# Altium PCB HBridgeMainBoard.PcbDoc (part 1 of 3)
Units mm, origin at the board's own origin, x right, y up, seen from the top; angles counter-clockwise.
Board outline 100 x 50 mm, 2 copper layers (Top Layer, Bottom Layer); 90 components, 87 nets, 308 pads, 1694 vias.
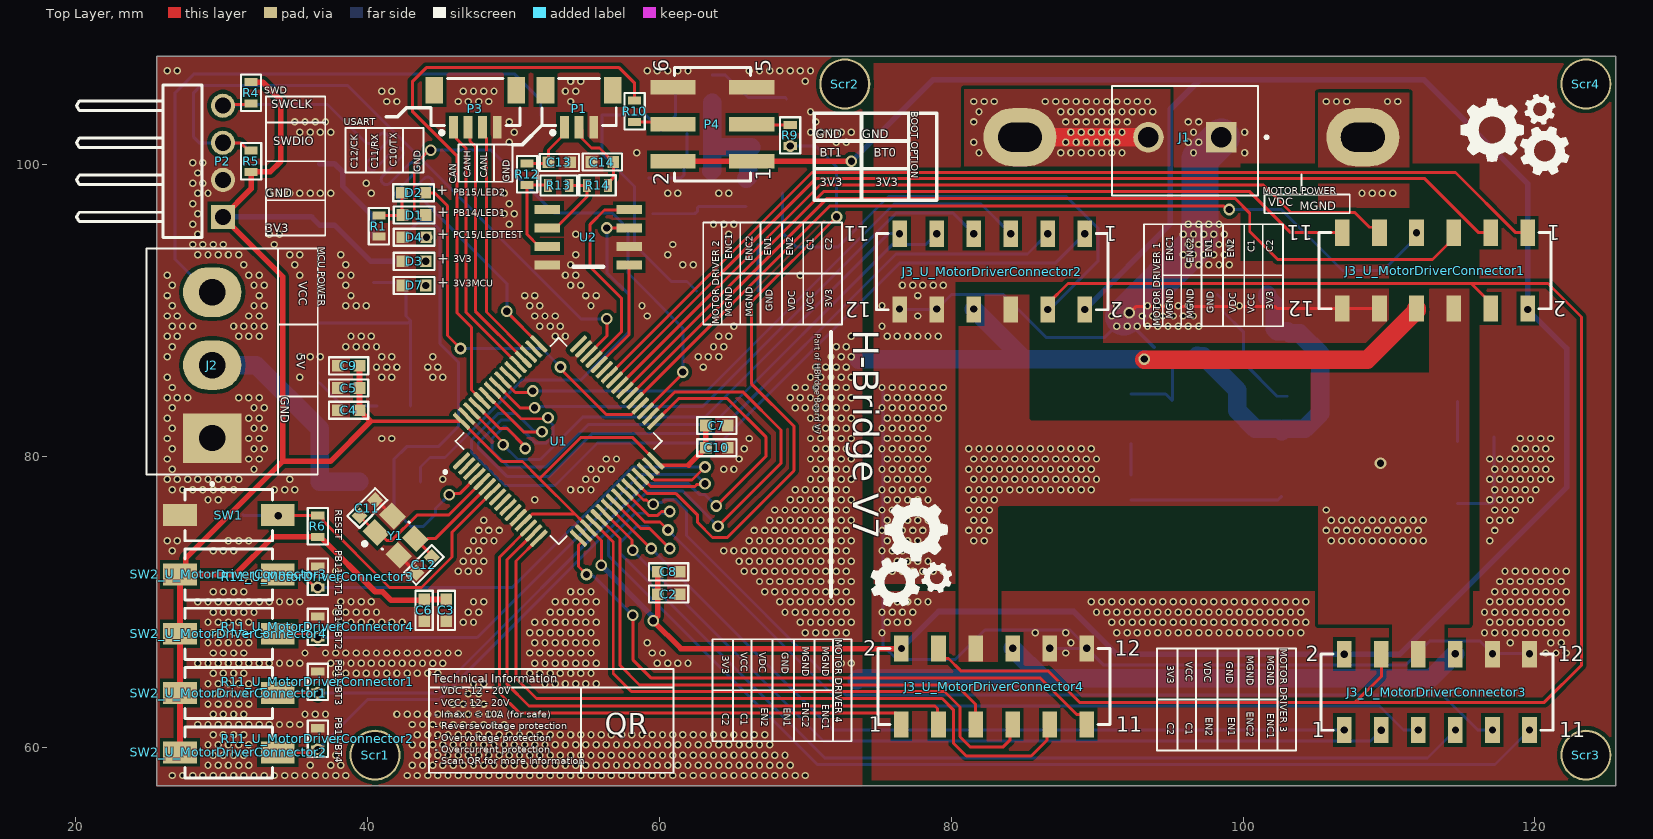
[diagram p0: Top Layer view]
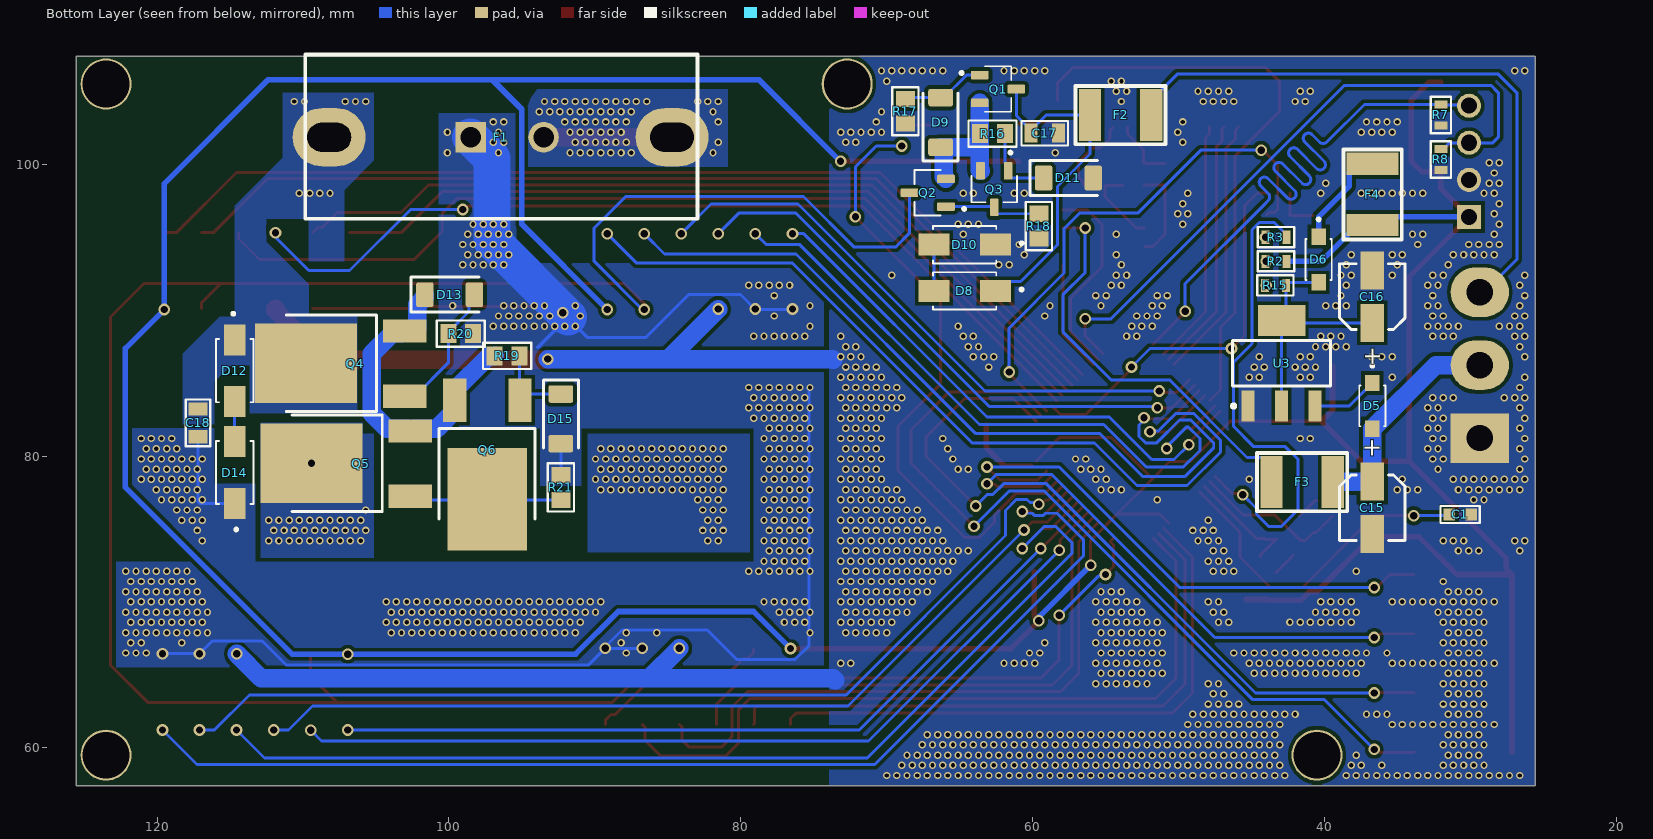
[diagram p1: Bottom Layer view, seen from below]
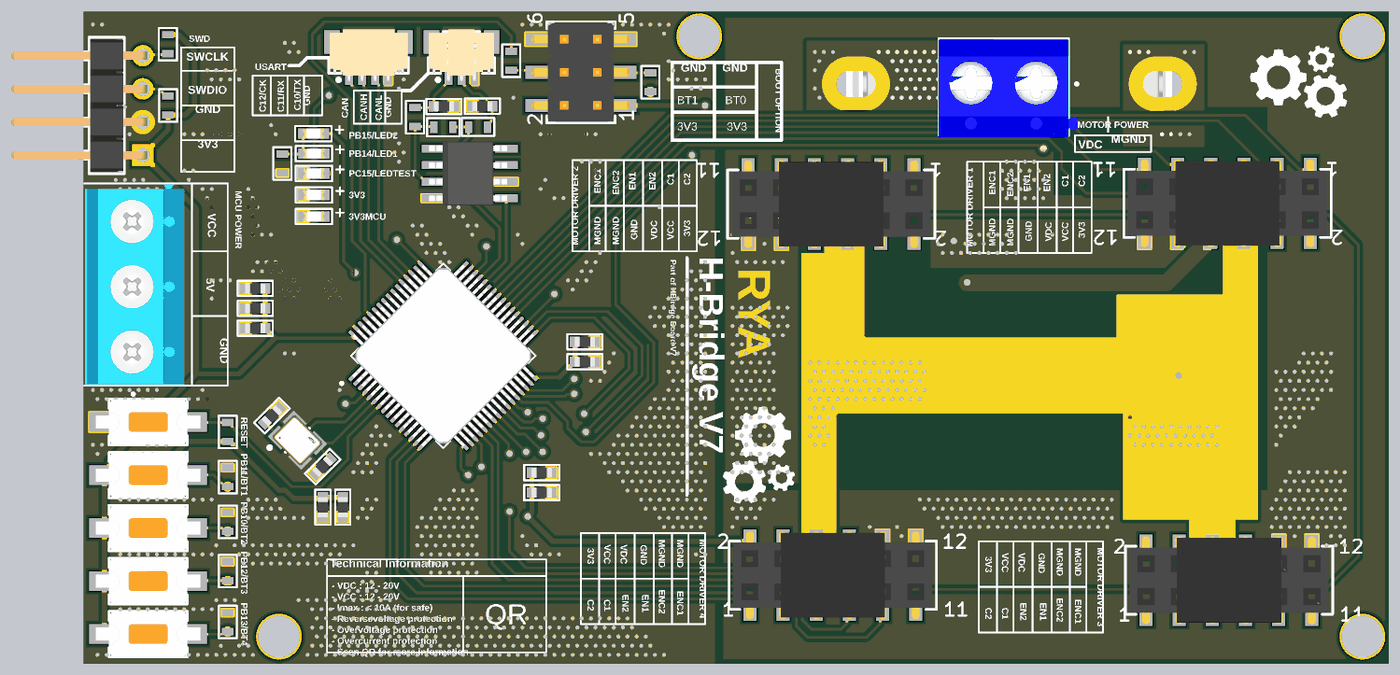
[diagram p3: 3D render of the assembled board from above, using the file's embedded part models]
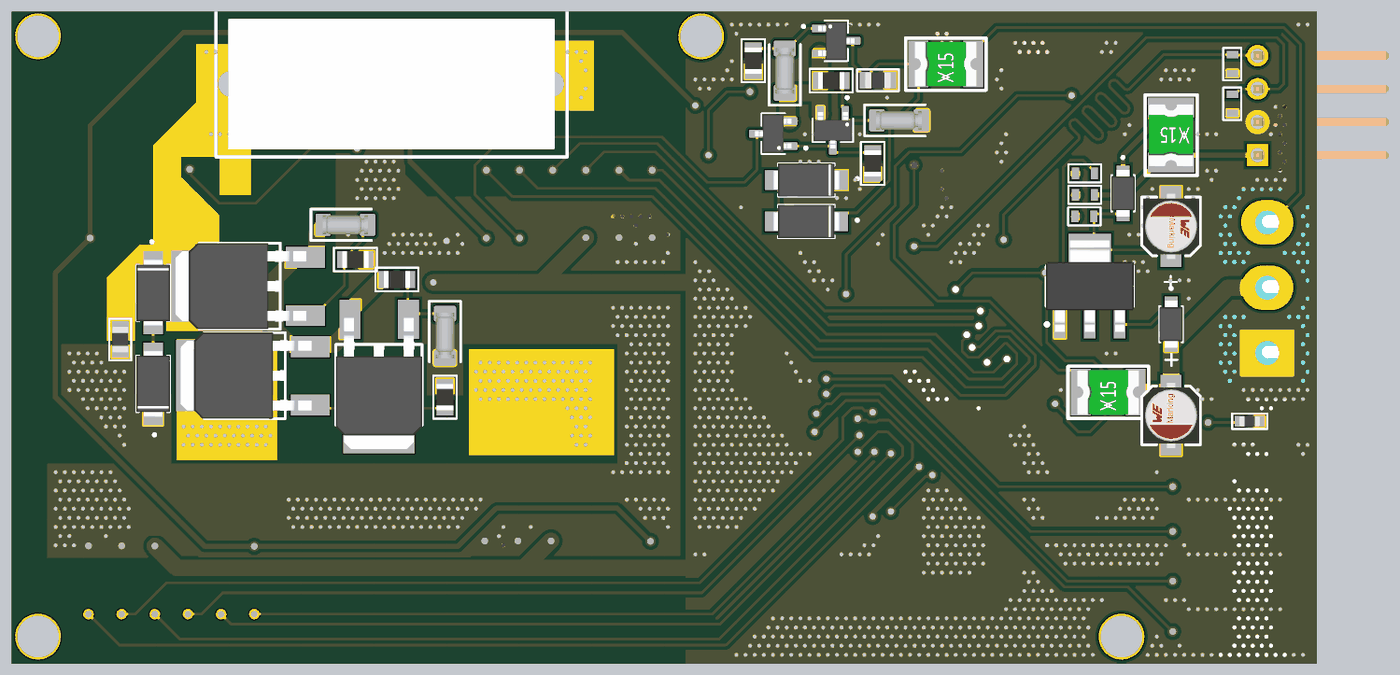
[diagram p4: 3D render of the assembled board from below, using the file's embedded part models]

## Layer stack, top to bottom
Top Solder: solder mask 0.0102, Solder Resist, Dk 3.5
Top Layer: signal copper 0.0356
Dielectric 1: dielectric 0.32, FR-4, Dk 4.8
Bottom Layer: signal copper 0.0356
Bottom Solder: solder mask 0.0102, Solder Resist, Dk 3.5

## Board outline
25.527,57.404 25.527,107.404 125.527,107.404 125.527,57.404

## Design rules (kind name [scope] priority, off if disabled: settings)
Clearance [All] p1: gap=0.254 ignorepadtopadclearanceinfootprint=FALSE except(0.05: SMDPad-SMDPad; 0.127: Arc-Arc Arc-Track Arc-SMDPad Track-Track Track-SMDPad)
MatchedLengths "Schematic Matched Net Lengths_3" [InNet('NetP2_3')] p1: tolerance=25.4 checknetsindiffpair=FALSE checkdiffpairvsdiffpair=TRUE checkxsignals=TRUE checkothers=TRUE usedelayunits=TRUE delaytolerance=10.000000
MatchedLengths "Schematic Matched Net Lengths_2" [InNet('NetP2_4')] p2: tolerance=25.4 checknetsindiffpair=FALSE checkdiffpairvsdiffpair=TRUE checkxsignals=TRUE checkothers=TRUE usedelayunits=TRUE delaytolerance=10.000000
PolygonConnect [All] p1: connectstyle=Direct reliefconductorwidth=0.254 reliefentries=4 polygonreliefangle="90 Angle" airgapwidth=0.254
RoutingVias [All] p1: holewidth=0.711 width=1.27 viastyle="Through Hole" minholewidth=0.711 minwidth=1.27 maxholewidth=0.711 maxwidth=1.27
SilkToSilkClearance [All] p1: silktosilkclearance=0
SilkToSolderMaskClearance [IsPad] p1: minsilkscreentomaskgap=0 clearancetoexposedcopper=TRUE
SolderMaskExpansion [All] p1: expansion=0.102 istentingtop=FALSE
SupplyNets "Schematic Supply Nets_13" [InNet('Vin')] p1: voltage=0.000
SupplyNets "Schematic Supply Nets_10" [InNet('MGND')] p2: voltage=0.000
SupplyNets "Schematic Supply Nets_6" [InNet('GND')] p3: voltage=0.000
SupplyNets "Schematic Supply Nets_4" [InNet('VDCin')] p4: voltage=0.000
SupplyNets "Schematic Supply Nets_16" [InNet('CAN5V')] p5: voltage=0.000
SupplyNets "Schematic Supply Nets_14" [InNet('VDC_U_MotorDriverConnector1')] p6: voltage=0.000
SupplyNets "Schematic Supply Nets_12" [InNet('3V3')] p7: voltage=0.000
SupplyNets "Schematic Supply Nets_11" [InNet('POWER3V3')] p8: voltage=0.000
SupplyNets "Schematic Supply Nets_7" [InNet('VDC')] p9: voltage=0.000
SupplyNets "Schematic Supply Nets_5" [InNet('5V')] p10: voltage=0.000
SupplyNets "Schematic Supply Nets_3" [InNet('VCC_U_MotorDriverConnector1')] p11: voltage=0.000
SupplyNets "Schematic Supply Nets" [InNet('VCC')] p12: voltage=0.000
Width "Schematic Width Constraint_9" [InNet('VDCin')] p1: maxlimit=2.54 minlimit=1.27 preferedwidth=1.27
Width "Schematic Width Constraint_8" [InNet('NetD13_K')] p2: maxlimit=2.54 minlimit=1.27 preferedwidth=1.27
Width "Schematic Width Constraint_7" [InNet('NetD9_K')] p3: maxlimit=2.54 minlimit=1.27 preferedwidth=1.27
Width "Schematic Width Constraint_4" [InNet('VDC_U_MotorDriverConnector1')] p4: maxlimit=2.54 minlimit=1.27 preferedwidth=1.27
Width "Schematic Width Constraint_3" [InNet('3V3')] p5: maxlimit=2.54 minlimit=0.178 preferedwidth=0.381
Width "Schematic Width Constraint_2" [InNet('POWER3V3')] p6: maxlimit=2.54 minlimit=0.178 preferedwidth=0.381
Width "Schematic Width Constraint_1" [InNet('VDC')] p7: maxlimit=2.54 minlimit=1.27 preferedwidth=1.27
Width [All] p8: maxlimit=2.54 minlimit=0.127 preferedwidth=0.203
28 further rules are at their usual default settings.

## Classes and differential pairs
component class U_VDCProtect: C18 D12 D13 D14 D15 Q4 Q5 Q6 R14 R15 R21
channel class MotorDriverConnector: U_MotorDriverConnector1 U_MotorDriverConnector2 U_MotorDriverConnector3 U_MotorDriverConnector4
component class U_TopLevelDesign: D1 D2 F1 F2 F3 F4 J1 J2 P1 P2 P3 R1 Scr1 Scr2 Scr3 Scr4
component class U_Protect: C17 D8 D9 D10 D11 Q1 Q2 Q3 R16 R17 R18
component class U_POWER: C15 C16 D5 D6 D7 R15 U3
component class U_MotorDriverConnector4: J3_U_MotorDriverConnector4 R11_U_MotorDriverConnector4 SW2_U_MotorDriverConnector4
component class U_MotorDriverConnector3: J3_U_MotorDriverConnector3 R11_U_MotorDriverConnector3 SW2_U_MotorDriverConnector3
component class U_MotorDriverConnector2: J3_U_MotorDriverConnector2 R11_U_MotorDriverConnector2 SW2_U_MotorDriverConnector2
component class U_MotorDriverConnector1: J3_U_MotorDriverConnector1 R11_U_MotorDriverConnector1 SW2_U_MotorDriverConnector1
component class U_MCU: C1 C2 C3 C4 C5 C6 C7 C8 C9 C10 C11 C12 D3 D4 P4 R2 R3 R4 R5 R6 R7 R8 R9 R10 SW1 U1 Y1
component class U_CAN_IC: C13 C14 R12 R13 R14 U2

## Components (designator, comment, footprint, x,y, rotation, side; value= is the part's Value field where it differs from the comment)
C1 "0106031041050" CAP_0603 30.734,76.073 r0 bottom value=100nF
C2 "0106031061010" CAP_0603 60.579,70.612 r180 top value=10µF
C3 "0106031051016" CAP_0603 45.466,69.469 r90 top value=1µF
C4 "0106031041050" CAP_0603 38.735,83.058 r0 top value=100nF
C5 "0106031041050" CAP_0603 38.735,84.582 r0 top value=100nF
C6 "0106031041050" CAP_0603 43.942,69.469 r90 top value=100nF
C7 "0106031041050" CAP_0603 63.881,82.169 r180 top value=100nF
C8 "0106031041050" CAP_0603 60.579,72.136 r180 top value=100nF
C9 "0106031051016" CAP_0603 38.735,86.106 r0 top value=1µF
C10 "0106031041050" CAP_0603 63.881,80.645 r180 top value=100nF
C11 "0106030800550" CAP_0603 39.878,76.454 r225 top value=8pF
C12 "0106030800550" CAP_0603 43.942,72.517 r45 top value=8pF
C13 "0106033300550" CAP_0603 53.086,100.203 r180 top value=33pF
C14 "0106033300550" CAP_0603 56.134,100.076 r0 top value=33pF
C15 "865080340003" WCAP-ASLI_D4H5.5 36.703,76.454 r90 bottom value="22uF, 16V"
C16 "865080340003" WCAP-ASLI_D4H5.5 36.703,90.932 r270 bottom value="22uF, 16V"
C17 "0108051041050" CAP_0805 59.182,102.108 r0 bottom value=100nF
C18 "0108051041050" CAP_0805 117.221,82.296 r90 bottom value=100nF
D1 "160603BlueClear" WL-SMCW_0603_H=0.7mm 43.18,96.52 r0 top value="Blue, 3.2V"
D2 "160603BlueClear" WL-SMCW_0603_H=0.7mm 43.142,98.044 r0 top value="Blue, 3.2V"
D3 "160603RedBlur" WL-SMCW_0603_H=0.7mm 43.18,93.345 r0 top value="Red, 2V"
D4 "160603WhiteBlur" WL-SMCW_0603_H=0.7mm 43.18,94.996 r0 top value=White
D5 "1N5819W" 1N5819W 36.703,83.439 r270 bottom
D6 "1N5819W" 1N5819W 40.386,93.472 r270 bottom
D7 "160603RedBlur" WL-SMCW_0603_H=0.7mm 43.18,91.694 r0 top value="Red, 2V"
D8 "SMAJ18A" DIOM4325X250N 64.643,91.313 r0 bottom
D9 "ZMM18" SOD-80_MiniMELF_Glass 66.294,102.87 r90 bottom value=Shottky-Diode
D10 "SMAJ18A" DIOM4325X250N 64.643,94.488 r0 bottom
D11 "ZMM18" SOD-80_MiniMELF_Glass 57.531,99.06 r180 bottom value=Shottky-Diode
D12 "SMAJ18A" DIOM4325X250N 114.681,85.852 r270 bottom
D13 "ZMM18" SOD-80_MiniMELF_Glass 99.949,91.059 r180 bottom value=Shottky-Diode
D14 "SMAJ18A" DIOM4325X250N 114.681,78.867 r90 bottom
D15 "ZMM18" SOD-80_MiniMELF_Glass 92.329,82.55 r270 bottom value=Shottky-Diode
F1 "0605201000250F" Fuse_Clip_0520 96.454,101.854 r0 bottom value="250 VAC, 10A"
F2 "061812110024" Fuse_SMD_1812 53.975,103.378 r0 bottom value="24V, 1.1A"
F3 "061812110024" Fuse_SMD_1812 41.529,78.232 r0 bottom value="24V, 1.1A"
F4 "061812020030" Fuse_SMD_1812 36.703,97.917 r270 bottom value="30V, 0.2A"
J1 "KF301-2P" HANDSON_KF301-2P 96.012,101.854 r180 top
J2 "796683-3" TE_796683-3 29.337,81.233 r90 top
J3_U_MotorDriverConnector1 "61031221821" 61031221821 113.157,92.71 r180 top (schematic designator J3)
J3_U_MotorDriverConnector2 "61031221821" 61031221821 82.804,92.643 r180 top (schematic designator J3)
J3_U_MotorDriverConnector3 "61031221821" 61031221821 113.284,63.821 r0 top (schematic designator J3)
J3_U_MotorDriverConnector4 "61031221821" 61031221821 82.931,64.202 r0 top (schematic designator J3)
P1 "665303124022" 665303124022 54.483,104.267 r0 top value="1A, 125 V (AC)"
P2 "61300411021" 61300411021 27.305,100.203 r270 top
P3 "665304124022" 665304124022 47.371,104.267 r0 top value="1A, 125 V (AC)"
P4 "61030621121" 61030621121 63.627,102.743 r90 top
Q1 "AO3407A" SOT95P280X125-3N 62.357,105.156 r180 bottom
Q2 "AO3407A" SOT95P280X125-3N 67.183,98.044 r0 bottom
Q3 "AO3407A" SOT95P280X125-3N 62.611,98.298 r270 bottom
Q4 "AOD4185" DPAK 107.95,86.36 r90 bottom
Q5 "AOD4185" DPAK 107.569,79.502 r90 bottom
Q6 "AOD4185" DPAK 97.384,78.892 r0 bottom
R1 "0006031021" resistor_0603 40.767,95.758 r90 top value="1 KOhm, 1/4 W"
R2 "0006031021" resistor_0603 43.307,93.345 r180 bottom value="1 KOhm, 1/4 W"
R3 "0006031021" resistor_0603 43.307,94.996 r180 bottom value="1 KOhm, 1/4 W"
R4 "0006030001" resistor_0603 32.004,104.902 r90 top value="0 Ohm, 1/4 W"
R5 "0006031031" resistor_0603 32.004,100.203 r270 top value="10 KOhm, 1/4 W"
R6 "0006031031" resistor_0603 36.576,75.184 r270 top value="10 KOhm, 1/4 W"
R7 "0006031031" resistor_0603 32.004,103.378 r90 bottom value="10 KOhm, 1/4 W"
R8 "0006030001" resistor_0603 32.004,100.33 r90 bottom value="0 Ohm, 1/4 W"
R9 "0006031031" resistor_0603 68.961,101.981 r90 top value="10 KOhm, 1/4 W"
R10 "0006031031" resistor_0603 58.293,103.632 r270 top value="10 KOhm, 1/4 W"
R11_U_MotorDriverConnector1 "0006031031" resistor_0603 36.576,64.516 r270 top value="10 KOhm, 1/4 W" (schematic designator R11)
R11_U_MotorDriverConnector2 "0006031031" resistor_0603 36.576,60.616 r270 top value="10 KOhm, 1/4 W" (schematic designator R11)
R11_U_MotorDriverConnector3 "0006031031" resistor_0603 36.576,71.718 r270 top value="10 KOhm, 1/4 W" (schematic designator R11)
R11_U_MotorDriverConnector4 "0006031031" resistor_0603 36.576,68.289 r270 top value="10 KOhm, 1/4 W" (schematic designator R11)
R12 "0006030001" resistor_0603 50.927,99.314 r90 top value="0 Ohm, 1/4 W"
R13 "0006031211" resistor_0603 53.086,98.552 r180 top value="120 Ohm, 1/4 W"
R14 "0006030001" resistor_0603 55.753,98.552 r0 top value="0 Ohm, 1/4 W"
R15 "0006031021" resistor_0603 43.344,91.694 r180 bottom value="1 KOhm, 1/4 W"
R16 "0008051031" RESISTOR_0805 62.738,102.108 r0 bottom value="10 KOhm, 1/8 W"
R17 "0008051031" RESISTOR_0805 68.707,103.632 r90 bottom value="10 KOhm, 1/8 W"
R18 "0008051031" RESISTOR_0805 59.563,95.758 r90 bottom value="10 KOhm, 1/8 W"
R19 "0008051031" RESISTOR_0805 96.012,86.868 r0 bottom value="10 KOhm, 1/8 W"
R20 "0008051031" RESISTOR_0805 99.187,88.392 r0 bottom value="10 KOhm, 1/8 W"
R21 "0008051031" RESISTOR_0805 92.329,77.851 r270 bottom value="10 KOhm, 1/8 W"
Scr1 "MP3.2" MP3.2 40.5,59.5 r90 top
Scr2 "MP3.2" MP3.2 72.7,105.5 r90 top
Scr3 "MP3.2" MP3.2 123.5,59.5 r90 top
Scr4 "MP3.2" MP3.2 123.5,105.5 r90 top
SW1 "434111043826" WS-TASV_L6W3.5H4.3_4341x10438x6 30.48,75.946 r0 top
SW2_U_MotorDriverConnector1 "434111043826" WS-TASV_L6W3.5H4.3_4341x10438x6 30.48,63.754 r180 top (schematic designator SW2)
SW2_U_MotorDriverConnector2 "434111043826" WS-TASV_L6W3.5H4.3_4341x10438x6 30.48,59.69 r180 top (schematic designator SW2)
SW2_U_MotorDriverConnector3 "434111043826" WS-TASV_L6W3.5H4.3_4341x10438x6 30.48,71.882 r180 top (schematic designator SW2)
SW2_U_MotorDriverConnector4 "434111043826" WS-TASV_L6W3.5H4.3_4341x10438x6 30.48,67.818 r180 top (schematic designator SW2)
U1 "STM32F103RCT6" QFP50P1200X1200X160-64N 53.086,81.026 r45 top
U2 "TJA1050" SOP8 55.118,94.996 r90 top
U3 "AMS1117-3.3V" "AMS1117-3.3V SOT223" 42.926,86.36 r90 bottom value="3.3V, 1A"
Y1 "CMP-200220-000002-1" FP-NX3225SA-MFG 41.91,74.549 r315 top

## Footprints (in the part's own frame and the unit in brackets; to place one, negate y for a bottom-side part, rotate by r counter-clockwise, add the part's x,y. Pads: shape width x height; smd on the part's side, far side on the other; paste and mask are expansions set on the pad)
1N5819W [mm]
  rect 1.12x0.99 smd: A(1.57,0) K(-1.57,0)
  silkscreen extent -2.85,-0.9 1.4,0.9, body extent -1.8,-0.9 1.8,0.9, height 1.1
61030621121 [mm] "Pin Header, pitch 2.54 mm, SMD, Vertical, dual row, 6p"
  rect 1x3.1 smd: 1(-2.54,-2.7) 2(-2.54,2.7) 3(0,-2.7) 4(0,2.7) 5(2.54,-2.7) 6(2.54,2.7)
  silkscreen extent -3.89,-2.62 3.89,2.62, body extent -3.81,-3.75 3.81,3.75, height 9.62
61031221821 [mm] "Socket Header, Pitch 2.54 mm, SMT, Vertical, dual row, 12p"
  rect 1x1.8 smd: 1(-6.35,-2.6) 2(-6.35,2.6) 3(-3.81,-2.6) 4(-3.81,2.6) 5(-1.27,-2.6) 6(-1.27,2.6) 7(1.27,-2.6) 8(1.27,2.6) 9(3.81,-2.6) 10(3.81,2.6) 11(6.35,-2.6) 12(6.35,2.6)
  silkscreen extent -7.95,-2.62 7.95,2.62, body extent -7.62,-3.35 7.62,3.35, height 8.52
61300411021 [mm] "Pin Header, pitch 2.54 mm, THT, Angled, single row, 4p"
  rect 1.65x1.65 hole 1.1: 1(3.81,2.77)
  round 1.65 hole 1.1: 2(1.27,2.77) 3(-1.27,2.77) 4(-3.81,2.77)
  silkscreen extent -5.23,-7.27 5.23,1.35, body extent -5.08,-7.27 5.08,3.09, height 2.58
665303124022 [mm] "1.00 mm SMT Male Vertical Shrouded Header, 3p"
  rect 0.6x1.55 smd: 1(-1,-1.725) 2(0,-1.725) 3(1,-1.725)
  rect 1.2x1.8 smd: MP1(-2.3,0.8) MP2(2.3,0.8)
  silkscreen extent -2.55,-2.22 2.55,1.6, body extent -2.5,-2.19 2.5,1.77, height 4.79
665304124022 [mm] "1.00 mm SMT Male Vertical Shrouded Header, 4p"
  rect 0.6x1.55 smd: 1(-1.5,-1.725) 2(-0.5,-1.725) 3(0.5,-1.725) 4(1.5,-1.725)
  rect 1.2x1.8 smd: MP1(-2.8,0.8) MP2(2.8,0.8)
  silkscreen extent -3.05,-2.22 3.05,1.6, body extent -3,-2.19 3,1.77, height 4.79
"AMS1117-3.3V SOT223" [mm] "SOT223, 4-Leads, Body 6.51x7.00mm, Pitch 2.29mm"
  rect 2.15x0.9 smd: 1(-2.93,2.29) 2(-2.93,0) 3(-2.93,-2.29)
  rect 2.15x3.25 smd: 4(2.93,0)
  silkscreen extent -3.05,-3.35 1.55,3.42, body extent -3.5,-3.35 3.5,3.35, height 1.8
CAP_0603 [mm]
  rect 0.8x0.8 smd: 1(-0.801,0.076) 2(0.699,0.076)
  silkscreen extent -1.4,-0.51 1.3,0.66, body extent -0.85,-0.32 0.75,0.48, height 0.8
CAP_0805 [mm]
  rect 0.9x1.3 smd: 1(-0.975,-0.025) 2(0.925,-0.025)
  silkscreen extent -1.63,-0.86 1.57,0.81, body extent -1.03,-0.65 0.97,0.6, height 0.6
DIOM4325X250N [mm]
  rect 2.12x1.5 smd: A(2.115,0) C(-2.115,0)
  silkscreen extent -4,-1.28 2.16,1.28, body extent -2.57,-1.28 2.57,1.28, height 2.5
DPAK [mil]
  rect 63x118 smd: 1(-89,-194) 3(87,-194)
  rect 214.63x275.59 smd: 4(0,72.94)
  silkscreen extent -130,-118 130,126, body extent -130,-198 130,198, height 94
FP-NX3225SA-MFG [mm]
  rect 1.4x1.2 smd paste+0 mask+0: 1(-1.1,-0.8) 2(1.1,-0.8) 3(1.1,0.8) 4(-1.1,0.8)
  silkscreen extent -1.22,-2.02 0.03,1.3, body extent -1.9,-1.5 1.9,1.5, height 0.25
Fuse_Clip_0520 [mm] "Clip Fuse, Size 0520"
  oval 5x4 hole 2 slot 3 at 0 deg: 0(-11.75,0) 1(11.75,0)
  silkscreen extent -13.49,-5.67 13.4,5.59, body extent -12.53,-5 12.47,5, height 15.1
Fuse_SMD_1812 [mil] "Fuse SMD, size 1812"
  rect 60x140 smd: 0(-83.41,0) 1(82,0)
  silkscreen extent -122,-78 121,79, body extent -93,-67 93,67, height 18
HANDSON_KF301-2P [mm]
  rect 2.1x2.1 hole 1.4: 1(-2.5,0)
  round 2.1 hole 1.4: 2(2.5,0)
  silkscreen extent -5.7,-3.5 5,4, body extent -5.6,-3.37 5,4.13, height 10.13
MP3.2 [mm]
  round 3.5 hole 3.2: 1(0,0)
  body extent -2.75,-2.75 2.74,2.75, height 2.98
QFP50P1200X1200X160-64N [mm]
  rrect50% 1.49x0.28 smd: 1(-5.67,3.75) 2(-5.67,3.25) 3(-5.67,2.75) 4(-5.67,2.25) 5(-5.67,1.75) 6(-5.67,1.25) 7(-5.67,0.75) 8(-5.67,0.25) 9(-5.67,-0.25) 10(-5.67,-0.75) 11(-5.67,-1.25) 12(-5.67,-1.75) 13(-5.67,-2.25) 14(-5.67,-2.75) 15(-5.67,-3.25) 16(-5.67,-3.75) 33(5.67,-3.75) 34(5.67,-3.25) 35(5.67,-2.75) 36(5.67,-2.25) 37(5.67,-1.75) 38(5.67,-1.25) 39(5.67,-0.75) 40(5.67,-0.25) 41(5.67,0.25) 42(5.67,0.75) 43(5.67,1.25) 44(5.67,1.75) 45(5.67,2.25) 46(5.67,2.75) 47(5.67,3.25) 48(5.67,3.75)
  rrect50% 0.28x1.49 smd: 17(-3.75,-5.67) 18(-3.25,-5.67) 19(-2.75,-5.67) 20(-2.25,-5.67) 21(-1.75,-5.67) 22(-1.25,-5.67) 23(-0.75,-5.67) 24(-0.25,-5.67) 25(0.25,-5.67) 26(0.75,-5.67) 27(1.25,-5.67) 28(1.75,-5.67) 29(2.25,-5.67) 30(2.75,-5.67) 31(3.25,-5.67) 32(3.75,-5.67) 49(3.75,5.67) 50(3.25,5.67) 51(2.75,5.67) 52(2.25,5.67) 53(1.75,5.67) 54(1.25,5.67) 55(0.75,5.67) 56(0.25,5.67) 57(-0.25,5.67) 58(-0.75,5.67) 59(-1.25,5.67) 60(-1.75,5.67) 61(-2.25,5.67) 62(-2.75,5.67) 63(-3.25,5.67) 64(-3.75,5.67)
  silkscreen extent -7.1,-5 5,5, body extent -6,-6 6,6, height 1.61
resistor_0603 [mm]
  rect 0.55x0.9 smd: 1(-0.725,0) 2(0.725,0)
  silkscreen extent -1.25,-0.69 1.24,0.7, body extent -0.8,-0.45 0.8,0.45, height 0.5
RESISTOR_0805 [mm] "Chip Resistor, 2-Leads, Body 2,00x1,20mm, IPC Medium Density"
  rect 1.1x1.3 smd: 1(-0.85,0) 2(0.85,0)
  silkscreen extent -1.65,-0.9 1.65,0.9, body extent -1,-0.65 1,0.65, height 0.45
SOD-80_MiniMELF_Glass [mm]
  rrect25% 1.2x1.7 smd: A(1.7,0) K(-1.7,0)
  silkscreen extent -2.65,-1.2 2,1.2, body extent -1.76,-0.72 1.74,0.72, height 1.45
SOP8 [mm]
  rect 0.6x1.75 smd: 1(-1.905,-2.8) 2(-0.635,-2.8) 3(0.635,-2.8) 4(1.905,-2.8) 5(1.905,2.8) 6(0.635,2.8) 7(-0.635,2.8) 8(-1.905,2.8)
  silkscreen extent -2.03,-1.02 -2.03,1.02, body extent -2.45,-2.87 2.45,3.13, height 1.75
SOT95P280X125-3N [mm]
  rrect25% 1.21x0.59 smd: 1(-1.255,0.95) 2(-1.255,-0.95) 3(1.255,0)
  silkscreen extent -2.6,-1.56 0.9,1.56, body extent -1.4,-1.45 1.4,1.45, height 1.25
TE_796683-3 [mm]
  rect 3.4x4 hole 1.805: 1(0,0)
  oval 3.4x4 hole 1.805: 2(5,0) 3(10,0)
  silkscreen extent -3.25,-4.5 13,4.5, body extent -2.42,-3.92 12.93,3.68, height 10.46
WCAP-ASLI_D4H5.5 [mm] "Aluminium Electrolytic V-Chip SMT Capacitors, 4x5.5mm"
  rect 2.6x1.6 smd: 1(1.8,0) 2(-1.8,0)
  silkscreen extent -2.25,-2.25 2.25,2.25, body extent -2.5,-2.15 2.5,2.15, height 5.5
WL-SMCW_0603_H=0.7mm [mm] "SMD Mono-color Chip LED, body 1.6x0.8mm"
  rect 0.8x0.8 smd: 1(-0.8,0) 2(0.8,0)
  silkscreen extent -1.4,-0.58 1.4,0.58, body extent -0.8,-0.4 0.8,0.4, height 0.7
WS-TASV_L6W3.5H4.3_4341x10438x6 [mm] "SMD Tact Switch, body 6x3.5mm"
  rect 2.3x1.5 smd: 1(-3.35,0) 2(3.35,0)
  silkscreen extent -3,-1.75 3,1.75, body extent -4,-1.75 4,1.75, height 4.3

## Part data
C1 C4 C5 C6 C7 C8 C10: library part CMP-001-00214-1, "CAP, size 0603, 100 nF, 50 VDC", Manufacture Name=TDK, Manufacture SN=CGA3E3X8R1H104K080AE, Operating Temperature="-55 to +125degC", Tolerance=10%, Voltage Rating DC="50 VDC", Component Type=Standard, Design Item ID=0106031041050, Mounting Technology=SMT, Packaging="Tape and Reel", Pins=2, Size=0603, Source=Capacitor_0603_10_percent.SchLib, Supplier 1 Name=Mouser, Supplier 1 SN=810-CGA3E3X8R1H104KA, Supplier 1 URL=https://www.mouser.com/ProductDetail/TDK/CGA3E3X8R1H104K080AE?qs=nQSIdc08i%252Bd8g3IRRgU2bw%3D%3D&utm_source=mouser-refine-download&utm_medium=file&utm_campaign=CGA3E3X8R1H104K080AE&utm_content=TDK, Supplier 2 Name=Digi-Key, Supplier 2 SN=445-173697-2-ND, Supplier 2 URL=https://www.digikey.com/en/products/detail/tdk-corporation/cga3e3x8r1h104k080ae/5809262, Supplier 3 Name=thegioiic, Supplier 3 SN=N/A, Supplier 3 URL=N/A
C2: library part CMP-001-00219-1, "CAP, size 0603, 10 uF, 10 VDC", Manufacture Name="Samsung Electro-Mechanics", Manufacture SN=CL10A106KP8NNWC, Operating Temperature="-55 to +125degC", Tolerance=10%, Voltage Rating DC="10 VDC", Component Type=Standard, Design Item ID=0106031061010, Mounting Technology=SMT, Packaging="Tape and Reel", Pins=2, Size=0603, Source=Capacitor_0603_10_percent.SchLib, Supplier 1 Name=Mouser, Supplier 1 SN=187-CL10A106KP8NNWC, Supplier 1 URL=https://www.mouser.vn/ProductDetail/Samsung-Electro-Mechanics/CL10A106KP8NNWC?qs=xZ%2FP%252Ba9zWqZx8LSX23YqWA%3D%3D&utm_source=mouser-refine-download&utm_medium=file&utm_campaign=CL10A106KP8NNWC&utm_content=Samsung-Electro-Mechanics, Supplier 2 Name=Digi-Key, Supplier 2 SN=1276-CL10A106KP8NNWCTR-ND, Supplier 2 URL=https://www.digikey.com/en/products/detail/samsung-electro-mechanics/cl10a106kp8nnwc/16572907, Supplier 3 Name=thegioiic, Supplier 3 SN=N/A, Supplier 3 URL=https://www.thegioiic.com/tu-gom-0603-10uf-25v
C3 C9: library part CMP-001-00215-1, "CAP, size 0603, 1 uF, 16 VDC", Manufacture Name="Samsung Electro-Mechanics", Manufacture SN=CL10B105KO8NNWC, Operating Temperature="-55 to +125degC", Tolerance=10%, Voltage Rating DC="16 VDC", Component Type=Standard, Design Item ID=0106031051016, Mounting Technology=SMT, Packaging="Tape and Reel", Pins=2, Size=0603, Source=Capacitor_0603_10_percent.SchLib, Supplier 1 Name=Mouser, Supplier 1 SN=187-CL10B105KO8NNWC, Supplier 1 URL=https://www.mouser.vn/ProductDetail/Samsung-Electro-Mechanics/CL10B105KO8NNWC?qs=81r%252BiQLm7BT%252BXtc72qn1ug%3D%3D&utm_source=mouser-refine-download&utm_medium=file&utm_campaign=CL10B105KO8NNWC&utm_content=Samsung-Electro-Mechanics, Supplier 2 Name=Digi-Key, Supplier 2 SN=1276-CL10B105KO8NNWCTR-ND, Supplier 2 URL=https://www.digikey.com/en/products/detail/samsung-electro-mechanics/cl10b105ko8nnwc/16572783, Supplier 3 Name=thegioiic, Supplier 3 SN=N/A, Supplier 3 URL=https://www.thegioiic.com/tu-gom-0603-1uf-16v
C11 C12: library part CMP-001-00207-1, "CAP, size 0603, 8 pF, 50 VDC", Manufacture Name=TDK, Manufacture SN=CGA3E2NP01H060D080AA, Operating Temperature="-55 to +125degC", Tolerance=5%, Voltage Rating DC="50 VDC", Component Type=Standard, Design Item ID=0106030600550, Mounting Technology=SMT, Packaging="Tape and Reel", Pins=2, Size=0603, Source=Capacitor_0603_5_percent.SchLib, Supplier 1 Name=Mouser, Supplier 1 SN=810-CGA3E2NP01H060DA, Supplier 1 URL=https://www.mouser.com/ProductDetail/TDK/CGA3E2NP01H060D080AA?qs=xLDY6iXSiQboN%2F6my%2FnNkQ%3D%3D&utm_source=mouser-refine-download&utm_medium=file&utm_campaign=CGA3E2NP01H060D080AA&utm_content=TDK, Supplier 2 Name=Digi-Key, Supplier 2 SN=445-12427-2-ND, Supplier 2 URL=https://www.digikey.com/en/products/detail/tdk-corporation/cga3e2np01h060d080aa/3949663, Supplier 3 Name=thegioiic, Supplier 3 SN=N/A, Supplier 3 URL=N/A
C13 C14: library part CMP-001-00238-1, "CAP, size 0603, 33 pF, 50 VDC", Manufacture Name=TDK, Manufacture SN=CGA3E2NP01H330J080AA, Operating Temperature="-55 to +125degC", Tolerance=5%, Voltage Rating DC="50 VDC", Component Type=Standard, Design Item ID=0106033300550, Mounting Technology=SMT, Packaging="Tape and Reel", Pins=2, Size=0603, Source=Capacitor_0603_5_percent.SchLib, Supplier 1 Name=Mouser, Supplier 1 SN=810-CGA3E2NP01H330JA, Supplier 1 URL=https://www.mouser.com/ProductDetail/TDK/CGA3E2NP01H330J080AA?qs=xLDY6iXSiQZLs28ZlT4aFg%3D%3D&utm_source=mouser-refine-download&utm_medium=file&utm_campaign=CGA3E2NP01H330J080AA&utm_content=TDK, Supplier 2 Name=Digi-Key, Supplier 2 SN=445-12409-2-ND, Supplier 2 URL=https://www.digikey.com/en/products/detail/tdk-corporation/cga3e2np01h330j080aa/3949645, Supplier 3 Name=thegioiic, Supplier 3 SN=N/A, Supplier 3 URL=N/A
C15 C16: library part CMP-014-00040-1, "V-Chip, D4 x H5.5mm, 22uF, 16V", Capacitance=22µF, Capacitance Tolerance=+/-20%, Leakage Current=3.52uA, Manufacturer="Wurth Elektronik", Manufacturer Part Number=N/A, Operating Temperature Max=105°C, Operating Temperature Min=-55°C, Rated Voltage (DC)=16V, Ripple Current=90mA, Category="Aluminum Electrolytic Capacitors", Component Type=Standard, Design Item ID=865080340003, Diameter=4mm, Dissipation Factor=16%, Endurance=2000h, Height=5.5mm, Mount="Surface Mount", Packaging="Tape and Reel", Pins=2, Source=Al_Cap.SchLib, Supplier 1 Name=Mouser, Supplier 1 SN=710-865080340003, Supplier 1 URL=https://www.mouser.com/ProductDetail/Wurth-Elektronik/865080340003?qs=0KOYDY2FL2%252BowmC4S50IuQ%3D%3D, Supplier 2 Name=Digi-Key, Supplier 2 SN=N/A, Supplier 2 URL=N/A, Supplier 3 Name=thegioiic, Supplier 3 SN=N/A, Supplier 3 URL=https://www.thegioiic.com/tu-nhom-smd-22uf-16v-4x5-4mm
C17 C18: library part CMP-001-00259-1, "CAP, size 0805, 0.1 nF, 50 VDC", Manufacture Name=TDK, Manufacture SN=CGA4J2X8R1H104K125AD, Operating Temperature="-55 to +125degC", Tolerance=10%, Voltage Rating DC="50 VDC", Component Type=Standard, Design Item ID=0108051041050, Mounting Technology=SMT, Packaging="Tape and Reel", Pins=2, Size=0805, Source=Capacitor_0805_10_percent.SchLib, Supplier 1 Name=Mouser, Supplier 1 SN=810-C2012X8R1H104KEP, Supplier 1 URL=https://www.mouser.vn/ProductDetail/TDK/CGA4J2X8R1H104K125AD?qs=LcTL%2F5vFEzExqZqv3rh1qQ%3D%3D&utm_source=mouser-refine-download&utm_medium=file&utm_campaign=CGA4J2X8R1H104K125AD&utm_content=TDK, Supplier 2 Name=Digi-Key, Supplier 2 SN=445-8810-2-ND, Supplier 2 URL=https://www.digikey.com/en/products/detail/tdk-corporation/cga4j2x8r1h104k125ad/3248169, Supplier 3 Name=thegioiic, Supplier 3 SN=OEM, Supplier 3 URL=N/A
D1 D2: library part CMP-004-00088-1, "WL-SMCW SMT Mono-color Chip LED Waterclear, size 0603, Blue, 3.2V, 140deg", Color=Blue, Component Type=Standard, ComponentLink1Description="Datasheet link", ComponentLink1URL=N/A, ComponentLink2Description="Supplier 1 URL", ComponentLink2URL=https://www.mouser.vn/ProductDetail/Wurth-Elektronik/150060BS75003?qs=Li%252BoUPsLEnu8LvIbM48DKA%3D%3D, ComponentLink3Description="Supplier 2 URL", ComponentLink3URL=https://www.digikey.com/en/products/detail/liteon/LTST-C191TBKT/388530, ComponentLink4Description="Supplier 3 URL", ComponentLink4URL=https://www.thegioiic.com/led-xanh-duong-0603-dan-smd-trong-suot, Design Item ID=160603BlueClear, Pins=2, Size=0603, Source=WL-SMCW_0603.SchLib, Supplier 1 Name=Mouser, Supplier 1 SN=710-150060GS75000, Supplier 1 URL=https://www.mouser.vn/ProductDetail/Wurth-Elektronik/150060BS75003?qs=Li%252BoUPsLEnu8LvIbM48DKA%3D%3D, Supplier 2 Name=Digi-Key, Supplier 2 SN=160-1647-2-ND, Supplier 2 URL=https://www.digikey.com/en/products/detail/liteon/LTST-C191TBKT/388530, Supplier 3 Name=ICDayRoi, Supplier 3 SN=N/A, Supplier 3 URL=https://www.thegioiic.com/led-xanh-duong-0603-dan-smd-trong-suot, Type=Clear
D3 D7: library part CMP-004-00093-1, "WL-SMCW SMT Mono-color Chip LED Blur, size 0603, Red, 2V, 140deg", Color=Red, Component Type=Standard, ComponentLink1Description="Datasheet link", ComponentLink1URL=N/A, ComponentLink2Description="Supplier 1 URL", ComponentLink2URL=https://www.mouser.vn/ProductDetail/ROHM-Semiconductor/CSL1901VW1?qs=vvQtp7zwQdNmrXZcE27xEA%3D%3D, ComponentLink3Description="Supplier 2 URL", ComponentLink3URL=https://www.digikey.com/en/products/detail/rohm-semiconductor/SML-D12U8WT86/1641799, ComponentLink4Description="Supplier 3 URL", ComponentLink4URL=N/A, Design Item ID=160603RedBlur, Pins=2, Size=0603, Source=WL-SMCW_0603.SchLib, Supplier 1 Name=Mouser, Supplier 1 SN=755-CSL1901VW1, Supplier 1 URL=https://www.mouser.vn/ProductDetail/ROHM-Semiconductor/CSL1901VW1?qs=vvQtp7zwQdNmrXZcE27xEA%3D%3D, Supplier 2 Name=Digi-Key, Supplier 2 SN=511-1580-2-ND, Supplier 2 URL=https://www.digikey.com/en/products/detail/rohm-semiconductor/SML-D12U8WT86/1641799, Supplier 3 Name=ICDayRoi, Supplier 3 SN=N/A, Supplier 3 URL=N/A, Type=Blur
D4: library part CMP-004-00095-1, "WL-SMCW SMT Mono-color Chip LED Blur, size 0603, White", Color=White, Component Type=Standard, ComponentLink1Description="Datasheet link", ComponentLink1URL=N/A, ComponentLink2Description="Supplier 1 URL", ComponentLink2URL=https://www.mouser.vn/ProductDetail/ROHM-Semiconductor/SMLEN3WBC8W1?qs=W0yvOO0ixfGun78rr9Unsw%3D%3D, ComponentLink3Description="Supplier 2 URL", ComponentLink3URL=https://www.digikey.com/en/products/detail/qt-brightek-qtb/QBLP601-IW/4814655, ComponentLink4Description="Supplier 3 URL", ComponentLink4URL=N/A, Design Item ID=160603WhiteBlur, Pins=2, Size=0603, Source=WL-SMCW_0603.SchLib, Supplier 1 Name=Mouser, Supplier 1 SN=755-SMLEN3WBC8W1, Supplier 1 URL=https://www.mouser.vn/ProductDetail/ROHM-Semiconductor/SMLEN3WBC8W1?qs=W0yvOO0ixfGun78rr9Unsw%3D%3D, Supplier 2 Name=Digi-Key, Supplier 2 SN=1516-1057-2-ND, Supplier 2 URL=https://www.digikey.com/en/products/detail/qt-brightek-qtb/QBLP601-IW/4814655, Supplier 3 Name=ICDayRoi, Supplier 3 SN=N/A, Supplier 3 URL=N/A, Type=Blur
D5 D6: library part CMP-004-00113-1, Component Type=Standard, Design Item ID=1N5819W, Pins=2, Source=1N5819W.SchLib
D8 D10 D12 D14: library part CMP-004-00085-1, "400W, 21.1V, 5%, Unidirectional, TVS", Case/Package="SMA-2 Taiwan Semiconductor", Check_prices=https://www.snapeda.com/parts/SMAJ18A/taiwan/view-part/?ref=eda, Component Type=Standard, Design Item ID=SMAJ18A, MF="Taiwan Semiconductor", MP=SMAJ18A, Pins=2, SnapEDA_Link=https://www.snapeda.com/parts/SMAJ18A/taiwan/view-part/?ref=snap, Source=SMAJ18A.SchLib
D9 D11 D13 D15: library part CMP-004-00086-2, Component Type=Standard, Datasheet=https://diotec.com/de/produktliste/SBD.html, Design Item ID=Schottky-Diode, ki_description="Schottky Diode", ki_keywords=Schottky, Pins=2, Reference=D, Source=schottky-diode.SchLib
F1: library part CMP-005-00031-1, "Glass Fuse, Size 0520, 250 VAC, 10A, F", Hold Current=10A, Manufacturer=Littelfuse, Threshold Current="100A (125VAC)", Threshold Voltage=250VAC, Component Type=Standard, ComponentLink1Description="Datasheet link", ComponentLink1URL=https://www.littelfuse.com/~/media/electronics/datasheets/fuses/littelfuse_fuse_234_datasheet.pdf.pdf, ComponentLink2Description="Supplier 1 URL", ComponentLink2URL=https://www.mouser.vn/ProductDetail/Littelfuse/0218010.HXP?qs=YKoktUZms5K5aEWQkceb8A%3D%3D, ComponentLink3Description="Supplier 2 URL", ComponentLink3URL=https://www.digikey.com/en/products/detail/littelfuse-inc/0218010-HXP/777141?s=N4IgTCBcDaIAxgIwA46LgOgBIA0AKIAugL5A, ComponentLink4Description="Supplier 3 URL", ComponentLink4URL=https://www.thegioiic.com/cau-chi-ong-thuy-tinh-10a-5x20mm-toc-do-f, Design Item ID=0605201000250F, Fuse speed=F, Mounting Technology="Holder / Clip", Pins=2, Size=0520, Source=Fuse_Clip.SchLib, Supplier 1 Name=Mouser, Supplier 1 SN=576-0218010.HXP, Supplier 1 URL=https://www.mouser.vn/ProductDetail/Littelfuse/0218010.HXP?qs=YKoktUZms5K5aEWQkceb8A%3D%3D, Supplier 2 Name=Digi-Key, Supplier 2 SN=F2425-ND, Supplier 2 URL=https://www.digikey.com/en/products/detail/littelfuse-inc/0218010-HXP/777141?s=N4IgTCBcDaIAxgIwA46LgOgBIA0AKIAugL5A, Supplier 3 Name=thegioiic, Supplier 3 SN=N/A, Supplier 3 URL=https://www.thegioiic.com/cau-chi-ong-thuy-tinh-10a-5x20mm-toc-do-f
F2 F3: library part CMP-005-00055-1, "Resettable Fuse, Size 1812, 24V, 1.1A", Hold Current=1.1A, Manufacturer=Bourns, Threshold Current=20A, Threshold Voltage=24V, Trip Current=2.2A, Component Type=Standard, ComponentLink1Description="Datasheet link", ComponentLink1URL=https://www.bourns.com/docs/Product-Datasheets/mfnsmf.pdf, ComponentLink2Description="Supplier 1 URL", ComponentLink2URL=https://www.mouser.vn/ProductDetail/Bourns/MF-MSMF110-24X-2?qs=tiksPeNXt0KSvkNsPEvQzw%3D%3D, ComponentLink3Description="Supplier 2 URL", ComponentLink3URL=https://www.digikey.com/en/products/detail/bourns-inc/MF-MSMF110-24X-2/2127043?s=N4IgTCBcDaILIDEC0cDKiCMGAMB6MALABpIQC6AvkA, ComponentLink4Description="Supplier 3 URL", ComponentLink4URL=https://www.thegioiic.com/mf-msmf110-24x-2-cau-chi-tu-phuc-hoi-1812-24v-1-1a, Design Item ID=061812110024, Mounting Technology=SMT/SMD, Pins=2, Size=1812, Source=Fuse_SMD.SchLib, Supplier 1 Name=Mouser, Supplier 1 SN=652-MF-MSMF110/24X-2, Supplier 1 URL=https://www.mouser.vn/ProductDetail/Bourns/MF-MSMF110-24X-2?qs=tiksPeNXt0KSvkNsPEvQzw%3D%3D, Supplier 2 Name=Digi-Key, Supplier 2 SN=MF-MSMF110/24X-2TR-ND, Supplier 2 URL=https://www.mouser.vn/ProductDetail/Bourns/MF-MSMF110-24X-2?qs=tiksPeNXt0KSvkNsPEvQzw%3D%3D, Supplier 3 Name=thegioiic, Supplier 3 SN=MF-MSMF110/24X-2, Supplier 3 URL=https://www.thegioiic.com/mf-msmf110-24x-2-cau-chi-tu-phuc-hoi-1812-24v-1-1a
F4: library part CMP-005-00050-1, "Resettable Fuse, Size 1812, 30V, 0.2A", Hold Current=0.2A, Manufacturer=Bourns, Threshold Current=80A, Threshold Voltage=30V, Trip Current=0.4A, Component Type=Standard, ComponentLink1Description="Datasheet link", ComponentLink1URL=https://www.bourns.com/docs/Product-Datasheets/mfnsmf.pdf, ComponentLink2Description="Supplier 1 URL", ComponentLink2URL=https://www.mouser.vn/ProductDetail/Bourns/MF-MSMF020-2?qs=YYkh393lUtjbPn24kFIUNQ%3D%3D, ComponentLink3Description="Supplier 2 URL", ComponentLink3URL=https://www.digikey.com/en/products/detail/bourns-inc/MF-MSMF020-2/662814?s=N4IgTCBcDaILIDEC0cDKiAMYNLAAhAF0BfIA, ComponentLink4Description="Supplier 3 URL", ComponentLink4URL=https://www.thegioiic.com/mf-msmf020-2-cau-chi-tu-phuc-hoi-1812-0-20a-30v, Design Item ID=061812020030, Mounting Technology=SMT/SMD, Pins=2, Size=1812, Source=Fuse_SMD.SchLib, Supplier 1 Name=Mouser, Supplier 1 SN=652-MF-MSMF020-2, Supplier 1 URL=https://www.mouser.vn/ProductDetail/Bourns/MF-MSMF020-2?qs=YYkh393lUtjbPn24kFIUNQ%3D%3D, Supplier 2 Name=Digi-Key, Supplier 2 SN=MF-MSMF020-2TR-ND, Supplier 2 URL=https://www.mouser.vn/ProductDetail/Bourns/MF-MSMF020-2?qs=YYkh393lUtjbPn24kFIUNQ%3D%3D, Supplier 3 Name=thegioiic, Supplier 3 SN=MF-MSMF020-2, Supplier 3 URL=https://www.thegioiic.com/mf-msmf020-2-cau-chi-tu-phuc-hoi-1812-0-20a-30v
J1: library part CMP-118-000001-1, "2 Pin Terminal Block 5mm Pitch", Package=None, Availability=Unavailable, Design Item ID=KF301-2P, MP=KF301-2P, Price=None, Source=KF301-2P.SchLib
J2: library part CMP-118-000000-1, "Wire to Board 3 Position 5 mm Pitch 30-12 AWG Euro Style Terminal Block", Package=None, Availability=Unavailable, Design Item ID=796683-3, EU_RoHS_Compliance="Compliant with Exemptions", MF="TE Connectivity", MP=796683-3, Price=None, SnapEDA_Link=https://www.snapeda.com/parts/796683-3/TE%20Connectivity/view-part/2375698/?ref=snap, Source=KF301-3P.SchLib, TE_purchase_URL=https://www.te.com/usa-en/product-796683-3.html?te_bu=Cor&te_type=disp&te_campaign=seda_glo_cor-seda-global-disp-prtnr-fy19-seda-model-bom-cta_sma-317_1&elqCampaignId=32493
J3_U_MotorDriverConnector1 J3_U_MotorDriverConnector2 J3_U_MotorDriverConnector3 J3_U_MotorDriverConnector4: library part CMP-002-00449-1, "WR-PHD Socket Header, SMT, pitch 2.54mm, Dual Row, Vertical, 12p", Contact Resistance=20mOhm, Manufacturer="Wurth Elektronik", Operating Temperature="-40 to +105degC", Rated Current=3A, Withstanding Voltage=600VAC, Working Voltage=250VAC, Component Type=Standard, ComponentLink1Description=Manufacturer, ComponentLink1URL=http://www.we-online.de, ComponentLink2Description=Datasheet, ComponentLink2URL=https://www.we-online.com/catalog/datasheet/61031221821.pdf, ComponentLink3Description="Global Supply", ComponentLink3URL=https://www.we-online.com/en/components/products/PHD_2_54_SMT_DUAL_SOCKET_HEADER_6100XX21821?sq=61031221821#61031221821, ComponentLink4Description="Global Supply", ComponentLink4URL=https://www.mouser.vn/ProductDetail/Wurth-Elektronik/61031221821?qs=Cb2nCFKsA8qsJuA9v2g26A%3D%3D, Design Item ID=61031221821, Gender="Socket Header", Manufacturer Part Number=61031221821, Mounting Technology=SMT, Orientation=Vertical, Packaging="Tape and Reel", Pin Number=12, Pins=12, Pitch=2.54mm, Published Date="May 2020", Row Number=Dual, Source="WR-PHD_Socket Header_2.54mm.SchLib", Supplier 1 Name=Mouser, Supplier 1 SN=710-61031221821, Supplier 1 URL=https://www.mouser.vn/ProductDetail/Wurth-Elektronik/61031221821?qs=Cb2nCFKsA8qsJuA9v2g26A%3D%3D, Supplier 2 Name=Digi-Key, Supplier 2 SN=N/A, Supplier 2 URL=N/A, Supplier 3 Name=thegioiic, Supplier 3 SN=N/A, Supplier 3 URL=N/A, System=Connector
P1: library part CMP-002-01223-1, "WR-WTB SMT Male Vertical Shrouded Header, pitch 1mm, 3p", Contact Resistance=20mOhm, Operating Temperature="-25 to +85degC", Rated Current=1A, Withstanding Voltage=500VAC, Working Voltage=50VAC, Component Type=Standard, ComponentLink1Description=Manufacturer, ComponentLink1URL=http://www.we-online.de, ComponentLink2Description=Datasheet, ComponentLink2URL=https://www.we-online.com/catalog/datasheet/665303124022.pdf, ComponentLink3Description="Global Supply", ComponentLink3URL=https://www.we-online.com/en/components/products/WTB_1_00_SMT_MALE_VERTICAL_SHROUDED_HEADER_6653XX124022?sq=665303124022#665303124022, ComponentLink4Description="Global Supply", ComponentLink4URL=https://www.mouser.vn/ProductDetail/Wurth-Elektronik/665303124022?qs=a9WhcLg8qCyV5ri9HU4hCQ%3D%3D, Design Item ID=665303124022, Gender=Male, Mounting Technology=SMT, Packaging="Tape and Reel", Part Number=665303124022, Pin Number=3, Pins=3, Pitch=1mm, Published Date="January 2020", Publisher="Wurth Elektronik", Source=WR-WTB_1.00mm.SchLib, Supplier 1 Name=Mouser, Supplier 1 SN=710-665303124022, Supplier 1 URL=https://www.mouser.vn/ProductDetail/Wurth-Elektronik/665303124022?qs=a9WhcLg8qCyV5ri9HU4hCQ%3D%3D, Supplier 2 Name=Digi-Key, Supplier 2 SN=N/A, Supplier 2 URL=N/A, Supplier 3 Name=thegioiic, Supplier 3 SN=N/A, Supplier 3 URL=N/A, Type=Vertical
P2: library part CMP-002-00473-1, "WR-PHD Pin Header, THT, pitch 2.54mm, Single Row, Angled, 4p", Contact Resistance=20mOhm, Manufacturer="Wurth Elektronik", Operating Temperature="-40 to +105degC", Rated Current=3A, Withstanding Voltage=500VAC, Working Voltage=250VAC, Component Type=Standard, ComponentLink1Description=Manufacturer, ComponentLink1URL=http://www.we-online.de, ComponentLink2Description=Datasheet, ComponentLink2URL=https://www.we-online.com/catalog/datasheet/61300411021.pdf, ComponentLink3Description="Global Supply", ComponentLink3URL=https://www.we-online.com/en/components/products/PHD_2_54_THT_ANGLED_PIN_HEADER_6130XX11021?sq=61300411021#61300411021, ComponentLink4Description="Global Supply", ComponentLink4URL=https://www.mouser.vn/ProductDetail/Wurth-Elektronik/61300411021?qs=PhR8RmCirEZA1t3zcLZqlA%3D%3D, Design Item ID=61300411021, Gender="Pin Header", Manufacturer Part Number=61300411021, Mounting Technology=THT, Orientation=Angled, Packaging=Bag, Pin Number=4, Pins=4, Pitch=2.54mm, Published Date="May 2020", Row Number=Single, Source="WR-PHD_Pin Header_2.54mm.SchLib", Supplier 1 Name=Mouser, Supplier 1 SN=710-61300411021, Supplier 1 URL=https://www.mouser.vn/ProductDetail/Wurth-Elektronik/61300411021?qs=PhR8RmCirEZA1t3zcLZqlA%3D%3D, Supplier 2 Name=Digi-Key, Supplier 2 SN=N/A, Supplier 2 URL=N/A, Supplier 3 Name=thegioiic, Supplier 3 SN=N/A, Supplier 3 URL=N/A, Supply name 1=Mouser
P3: library part CMP-002-01224-1, "WR-WTB SMT Male Vertical Shrouded Header, pitch 1mm, 4p", Contact Resistance=20mOhm, Operating Temperature="-25 to +85degC", Rated Current=1A, Withstanding Voltage=500VAC, Working Voltage=50VAC, Component Type=Standard, ComponentLink1Description=Manufacturer, ComponentLink1URL=http://www.we-online.de, ComponentLink2Description=Datasheet, ComponentLink2URL=https://www.we-online.com/catalog/datasheet/665304124022.pdf, ComponentLink3Description="Global Supply", ComponentLink3URL=https://www.we-online.com/en/components/products/WTB_1_00_SMT_MALE_VERTICAL_SHROUDED_HEADER_6653XX124022?sq=665304124022#665304124022, ComponentLink4Description="Global Supply", ComponentLink4URL=https://www.mouser.vn/ProductDetail/Wurth-Elektronik/665304124022?qs=a9WhcLg8qCx8aEna1KcTfg%3D%3D, Design Item ID=665304124022, Gender=Male, Mounting Technology=SMT, Packaging="Tape and Reel", Part Number=665304124022, Pin Number=4, Pins=4, Pitch=1mm, Published Date="January 2020", Publisher="Wurth Elektronik", Source=WR-WTB_1.00mm.SchLib, Supplier 1 Name=Mouser, Supplier 1 SN=710-665304124022, Supplier 1 URL=https://www.mouser.vn/ProductDetail/Wurth-Elektronik/665304124022?qs=a9WhcLg8qCx8aEna1KcTfg%3D%3D, Supplier 2 Name=Digi-Key, Supplier 2 SN=N/A, Supplier 2 URL=N/A, Supplier 3 Name=thegioiic, Supplier 3 SN=N/A, Supplier 3 URL=N/A, Type=Vertical
P4: library part CMP-002-00439-1, "WR-PHD Pin Header, SMT, pitch 2.54mm, Dual Row, Vertical, 6p", Contact Resistance=20mOhm, Manufacturer="Wurth Elektronik", Operating Temperature="-40 to +125degC", Rated Current=3A, Withstanding Voltage=500VAC, Working Voltage=250VAC, Component Type=Standard, ComponentLink1Description=Manufacturer, ComponentLink1URL=http://www.we-online.de, ComponentLink2Description=Datasheet, ComponentLink2URL=https://www.we-online.com/catalog/datasheet/61030621121.pdf, ComponentLink3Description="Global Supply", ComponentLink3URL=https://www.we-online.com/en/components/products/PHD_2_54_SMT_DUAL_PIN_HEADER_6100XX21121?sq=61030621121#61030621121, ComponentLink4Description="Global Supply", ComponentLink4URL=https://www.mouser.vn/ProductDetail/Wurth-Elektronik/61030621121?qs=PhR8RmCirEbl%2F20%2FFLRJRA%3D%3D, Design Item ID=61030621121, Gender="Pin Header", Manufacturer Part Number=61030621121, Mounting Technology=SMT, Orientation=Vertical, Packaging="Tape and Reel", Pin Number=6, Pins=6, Pitch=2.54mm, Published Date="May 2020", Row Number=Dual, Source="WR-PHD_Pin Header_2.54mm.SchLib", Supplier 1 Name=Mouser, Supplier 1 SN=710-61000621121, Supplier 1 URL=https://www.mouser.vn/ProductDetail/Wurth-Elektronik/61000621121?qs=PhR8RmCirEYoFU9UUO%252Bbug%3D%3D, Supplier 2 Name=Digi-Key, Supplier 2 SN=N/A, Supplier 2 URL=N/A, Supplier 3 Name=thegioiic, Supplier 3 SN=N/A, Supplier 3 URL=N/A, Supply name 1=Mouser
Q1 Q2 Q3: library part CMP-123-000000-1, "P-Channel 30 V 4.3A (Ta) 1.4W (Ta) Surface Mount SOT-23-3", Package="SOT-23 Alpha &amp; Omega Semiconductor", Check_prices=https://www.snapeda.com/parts/AO3407A/Alpha/view-part/?ref=eda, Component Type=Standard, Design Item ID=AO3407A, MF="Alpha &", MP=AO3407A, Pin Count=3, SnapEDA_Link=https://www.snapeda.com/parts/AO3407A/Alpha/view-part/?ref=snap, Source=AO3407A.SchLib
Q4 Q5 Q6: library part CMP-123-000001-2, "P-Channel 40V 40A (Tc) 2.5W (Ta), 62.5W (Tc) Surface Mount TO-252, (D-Pak)", Package="TO-252 Alpha &amp; Omega Semiconductor", Check_prices=https://www.snapeda.com/parts/AOD4185/Alpha/view-part/?ref=eda, Component Type=Standard, Design Item ID=AOD4185, MF="Alpha &", MP=AOD4185, Pin Count=3, SnapEDA_Link=https://www.snapeda.com/parts/AOD4185/Alpha/view-part/?ref=snap, Source=AOD4185.SchLib
R1 R2 R3 R15: library part CMP-009-00186-1, "RES, size 0603, 1 KOhm, 1/4 W", Manufacture  Name=OEM, Rated Power="1/4 W", Resistance Tolerance=+/-1%, Component Type=Standard, ComponentLink1Description="Datasheet link", ComponentLink1URL=https://www.yageo.com/upload/media/product/productsearch/datasheet/rchip/PYu-SR_20105_RoHS_L_10.pdf, ComponentLink2Description="Supplier 1 URL", ComponentLink2URL=N/A, ComponentLink3Description="Supplier 2 URL", ComponentLink3URL=https://www.digikey.com/en/products/detail/yageo/SR0603FR-7T1KL/9373103, ComponentLink4Description="Supplier 3 URL", ComponentLink4URL=N/A, Design Item ID=0006031021, Manufacture  SN=OEM, Mounting Technology=SMT, Pins=2, Size=0603, Source=Resistor_0603.SchLib, Supplier 1 Name=Mouser, Supplier 1 SN=71-RCS06031K00FKEA, Supplier 1 URL=https://www.mouser.vn/ProductDetail/Vishay-Dale/RCS06031K00FKEA?qs=sGAEpiMZZMvdGkrng054t9clqp6gtJJdzI9PGMrTQi4RTIuHToNahw%3D%3D, Supplier 2 Name=Digi-Key, Supplier 2 SN="YAG5829TR-ND YAG5829CT-ND YAG5829DKR-ND", Supplier 2 URL=https://www.digikey.com/en/products/detail/yageo/SR0603FR-7T1KL/9373103, Supplier 3 Name=thegioiic, Supplier 3 SN=N/A, Supplier 3 URL=N/A
R4 R8 R12 R14: library part CMP-009-00180-1, "RES, size 0603, 0 Ohm, 1/4 W", Manufacture  Name=YAGEO, Manufacture  SN=AC0603FR-070RL, Rated Power="1/4 W", Resistance Tolerance=+/-1%, Component Type=Standard, ComponentLink1Description="Datasheet link", ComponentLink1URL=https://www.mouser.com/datasheet/2/447/Yageo_06282023_ACseries-3224032.pdf, ComponentLink2Description="Supplier 1 URL", ComponentLink2URL=N/A, ComponentLink3Description="Supplier 2 URL", ComponentLink3URL=https://www.digikey.com/en/products/detail/yageo/ac0603fr-070rl/2827812, ComponentLink4Description="Supplier 3 URL", ComponentLink4URL=N/A, Design Item ID=0006030001, Mounting Technology=SMT, Pins=2, Size=0603, Source=Resistor_0603.SchLib, Supplier 1 Name=Mouser, Supplier 1 SN=603-AC0603FR-070RL, Supplier 1 URL=https://www.mouser.com/ProductDetail/YAGEO/AC0603FR-070RL?qs=sGAEpiMZZMtlubZbdhIBIOG3KwTtqrl%2FD2D%252BGuMCfoY%3D, Supplier 2 Name=Digi-Key, Supplier 2 SN=311-0.0LDTR-ND, Supplier 2 URL=https://www.digikey.com/en/products/detail/yageo/ac0603fr-070rl/2827812, Supplier 3 Name=thegioiic, Supplier 3 SN=N/A, Supplier 3 URL=https://www.thegioiic.com/dien-tro-0-ohm-0603-1-
R5 R6 R7 R9 R10 R11_U_MotorDriverConnector1 R11_U_MotorDriverConnector2 R11_U_MotorDriverConnector3 R11_U_MotorDriverConnector4: library part CMP-009-00188-1, "RES, size 0603, 10 KOhm, 1/4 W", Manufacture  Name=OEM, Rated Power="1/4 W", Resistance Tolerance=+/-1%, Component Type=Standard, ComponentLink1Description="Datasheet link", ComponentLink1URL=https://fscdn.rohm.com/en/products/databook/datasheet/passive/resistor/chip_resistor/esr-e.pdf, ComponentLink2Description="Supplier 1 URL", ComponentLink2URL=N/A, ComponentLink3Description="Supplier 2 URL", ComponentLink3URL=https://www.digikey.com/en/products/detail/rohm-semiconductor/ESR03EZPF1002/1983429, ComponentLink4Description="Supplier 3 URL", ComponentLink4URL=N/A, Design Item ID=0006031031, Manufacture  SN=OEM, Mounting Technology=SMT, Pins=2, Size=0603, Source=Resistor_0603.SchLib, Supplier 1 Name=Mouser, Supplier 1 SN=755-ESR03EZPF1002, Supplier 1 URL=https://www.mouser.vn/ProductDetail/ROHM-Semiconductor/ESR03EZPF1002?qs=sGAEpiMZZMvdGkrng054t67Efho1F8r6CDeAsqwFse8%3D, Supplier 2 Name=Digi-Key, Supplier 2 SN="RHM10KADTR-ND RHM10KADCT-ND RHM10KADDKR-ND", Supplier 2 URL=https://www.digikey.com/en/products/detail/rohm-semiconductor/ESR03EZPF1002/1983429, Supplier 3 Name=thegioiic, Supplier 3 SN=N/A, Supplier 3 URL=N/A
R13: library part CMP-009-00207-1, "RES, size 0603, 120 Ohm, 1/4 W", Manufacture  Name=OEM, Rated Power="1/4 W", Resistance Tolerance=+/-1%, Component Type=Standard, ComponentLink1Description="Datasheet link", ComponentLink1URL=https://www.yageo.com/upload/media/product/productsearch/datasheet/rchip/PYu-SR_20105_RoHS_L_10.pdf, ComponentLink2Description="Supplier 1 URL", ComponentLink2URL=N/A, ComponentLink3Description="Supplier 2 URL", ComponentLink3URL=https://www.digikey.com/en/products/detail/yageo/SR0603FR-7T120RL/9373099, ComponentLink4Description="Supplier 3 URL", ComponentLink4URL=N/A, Design Item ID=0006031211, Manufacture  SN=OEM, Mounting Technology=SMT, Pins=2, Size=0603, Source=Resistor_0603.SchLib, Supplier 1 Name=Mouser, Supplier 1 SN=603-SR0603FR-7T120RL, Supplier 1 URL=https://www.mouser.vn/ProductDetail/YAGEO/SR0603FR-7T120RL?qs=sGAEpiMZZMvdGkrng054tz1y1XEHv7sNpzSbq0ZWZmOggb8s%252BZMxlg%3D%3D, Supplier 2 Name=Digi-Key, Supplier 2 SN="YAG5825TR-ND YAG5825CT-ND YAG5825DKR-ND", Supplier 2 URL=https://www.digikey.com/en/products/detail/yageo/SR0603FR-7T120RL/9373099, Supplier 3 Name=thegioiic, Supplier 3 SN=N/A, Supplier 3 URL=N/A
R16 R17 R18 R19 R20 R21: library part CMP-009-00482-1, "RES, size 0805, 10 KOhm, 1/8 W", Manufacture  Name="Vishay Dale", Manufacture  SN=CRCW080515K0FKEAC, Rated Power="1/8 W", Resistance Tolerance=+/-1%, Component Type=Standard, ComponentLink1Description="Datasheet link", ComponentLink1URL=https://www.vishay.com/docs/28773/crcwce3.pdf, ComponentLink2Description="Supplier 1 URL", ComponentLink2URL=https://www.mouser.vn/ProductDetail/Vishay-Dale/CRCW080515K0FKEA?qs=bMjB6bAaLEM4rXT2DoR3BA%3D%3D, ComponentLink3Description="Supplier 2 URL", ComponentLink3URL=https://www.digikey.com/en/products/detail/vishay-dale/CRCW080515K0FKEAC/7928558, ComponentLink4Description="Supplier 3 URL", ComponentLink4URL=N/A, Design Item ID=0008051531, Mounting Technology=SMT, Pins=2, Size=0805, Source=Resistor_0805.SchLib, Supplier 1 Name=Mouser, Supplier 1 SN=71-CRCW0805-15K-E3, Supplier 1 URL=https://www.mouser.vn/ProductDetail/Vishay-Dale/CRCW080515K0FKEA?qs=bMjB6bAaLEM4rXT2DoR3BA%3D%3D, Supplier 2 Name=Digi-Key, Supplier 2 SN=541-4136-2-ND, Supplier 2 URL=https://www.digikey.com/en/products/detail/vishay-dale/CRCW080515K0FKEAC/7928558, Supplier 3 Name=Thegioiic, Supplier 3 SN=N/A, Supplier 3 URL=N/A
Scr1 Scr2 Scr3 Scr4: library part CMP-143-000000-1, Component Type=Standard, Design Item ID=MP3.2, Pin Count=1, Source=MP_3P2.SchLib
SW1 SW2_U_MotorDriverConnector1 SW2_U_MotorDriverConnector2 SW2_U_MotorDriverConnector3 SW2_U_MotorDriverConnector4: library part CMP-011-00107-1, "WS-TASV SMT Tact Switch, L6 x W3.5 x H4.3mm, 260g, SPST-NO, 12V, 50mA", Manufacturer="Wurth Elektronik", Operating Temperature Max=85°C, Operating Temperature Min=-40°C, Rated Current=50mA, Rated Voltage=12VDC, Category="Tact Switches", Circuit=SPST-NO, Component Type=Standard, Contact Material="Stainless Steel", Design Item ID=434111043826, Height=4.3mm, Length=6mm, Manufacturer Part Number=434111043826, Match Code=WS-TASV, Mount="Surface Mount", Operation Force=260g, Packaging="Tape and Reel", Pins=2, Source=Button.SchLib, Supplier 1 Name=Mouser, Supplier 1 SN=710-434111043826, Supplier 1 URL=https://www.mouser.vn/ProductDetail/Wurth-Elektronik/434111043826?qs=wr8lucFkNMW3koBfPj4qpQ%3D%3D, Supplier 2 Name=Digi-Key, Supplier 2 SN=732-7040-2-ND, Supplier 2 URL=https://www.digikey.com/en/products/detail/w%C3%BCrth-elektronik/434111043826/5209073, Supplier 3 Name=Thegioiic, Supplier 3 SN=N/A, Supplier 3 URL=N/A, Terminal Material="Copper Alloy", Terminal Plating=Silver, Washable=No, Width=3.5mm
U1: library part CMP-031-00016-5, "ARMÂ® CortexÂ®-M3 STM32F1 Microcontroller IC 32-Bit 72MHz 256KB (256K x 8) FLASH 64-LQFP (10x10)", Case/Package="LQFP-64 STMicroelectronics", Availability="In Stock", Check_prices=https://www.snapeda.com/parts/STM32F103RCT6/STMicroelectronics/view-part/?ref=eda, Component Type=Standard, Design Item ID=STM32F103RCT6, MF=STMicroelectronics, MP=STM32F103RCT6, Pins=64, Price=None, Purchase-URL=https://pricing.snapeda.com/search/part/STM32F103RCT6/?ref=eda, SnapEDA_Link=https://www.snapeda.com/parts/STM32F103RCT6/STMicroelectronics/view-part/?ref=snap, Source=STM32F103RCT6.SchLib
U2: library part CMP-016-000000-1, "1/1 Transceiver Half CANbus 8-SO", Package="SOIC-8 NXP Semiconductors", Availability="In Stock", Check_prices=https://www.snapeda.com/parts/TJA1050/NXP%20USA%20Inc./view-part/562764/?ref=eda, Design Item ID=TJA1050, MF="NXP USA", MP=TJA1050, Price=None, Purchase-URL=https://pricing.snapeda.com/search/part/TJA1050/?ref=eda, SnapEDA_Link=https://www.snapeda.com/parts/TJA1050/NXP%20USA%20Inc./view-part/562764/?ref=snap, Source=TJA1050.SchLib